# Altium PCB WavePCB.PcbDoc
Units mm, origin at the board's own origin, x right, y up, seen from the top; angles counter-clockwise.
Board outline 41.02 x 46.99 mm, 2 copper layers (Top Layer, Bottom Layer), stack 1.571 mm thick; 29 components, 30 nets, 137 pads, 29 vias.
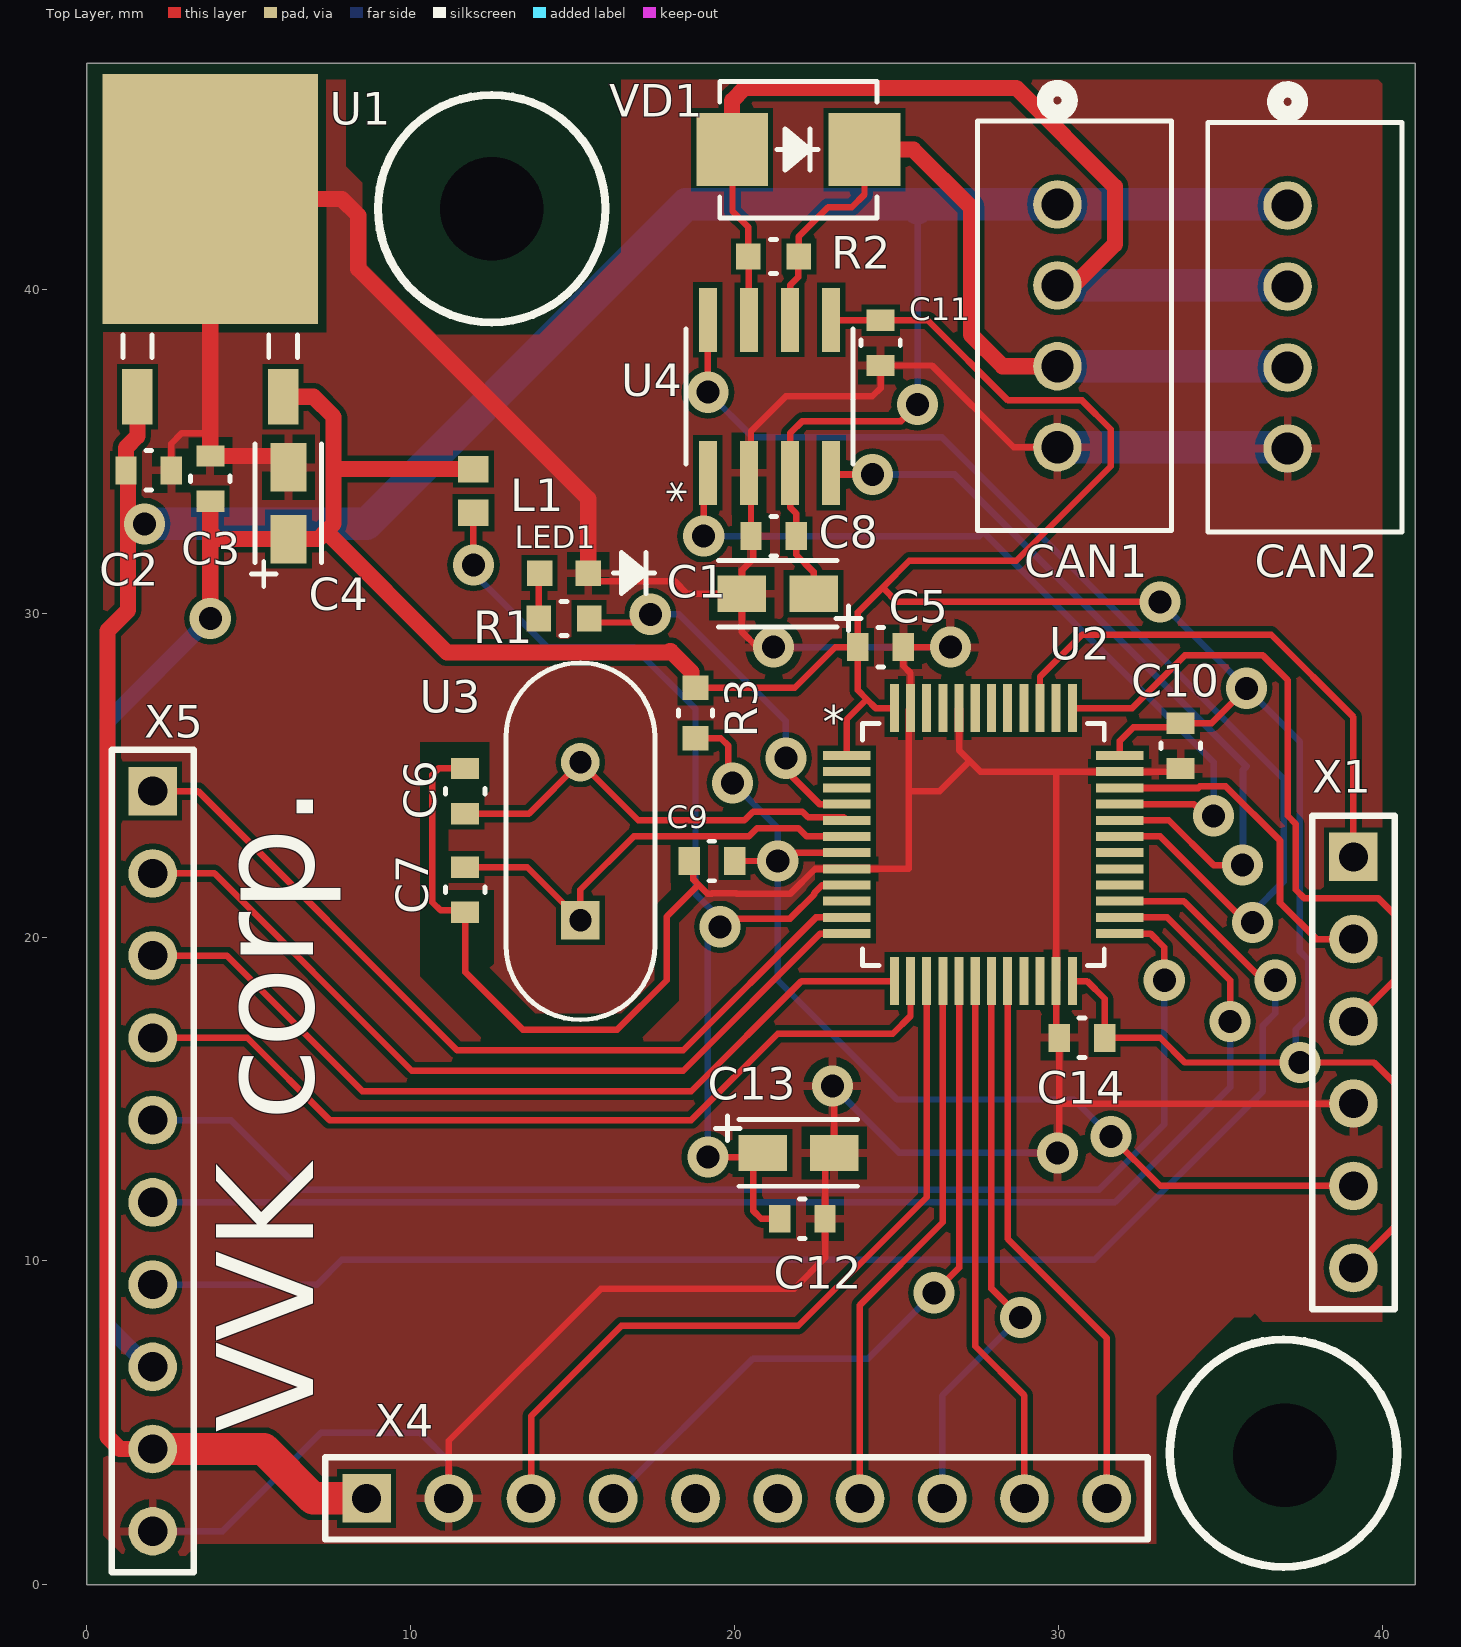
[diagram p0: Top Layer view]
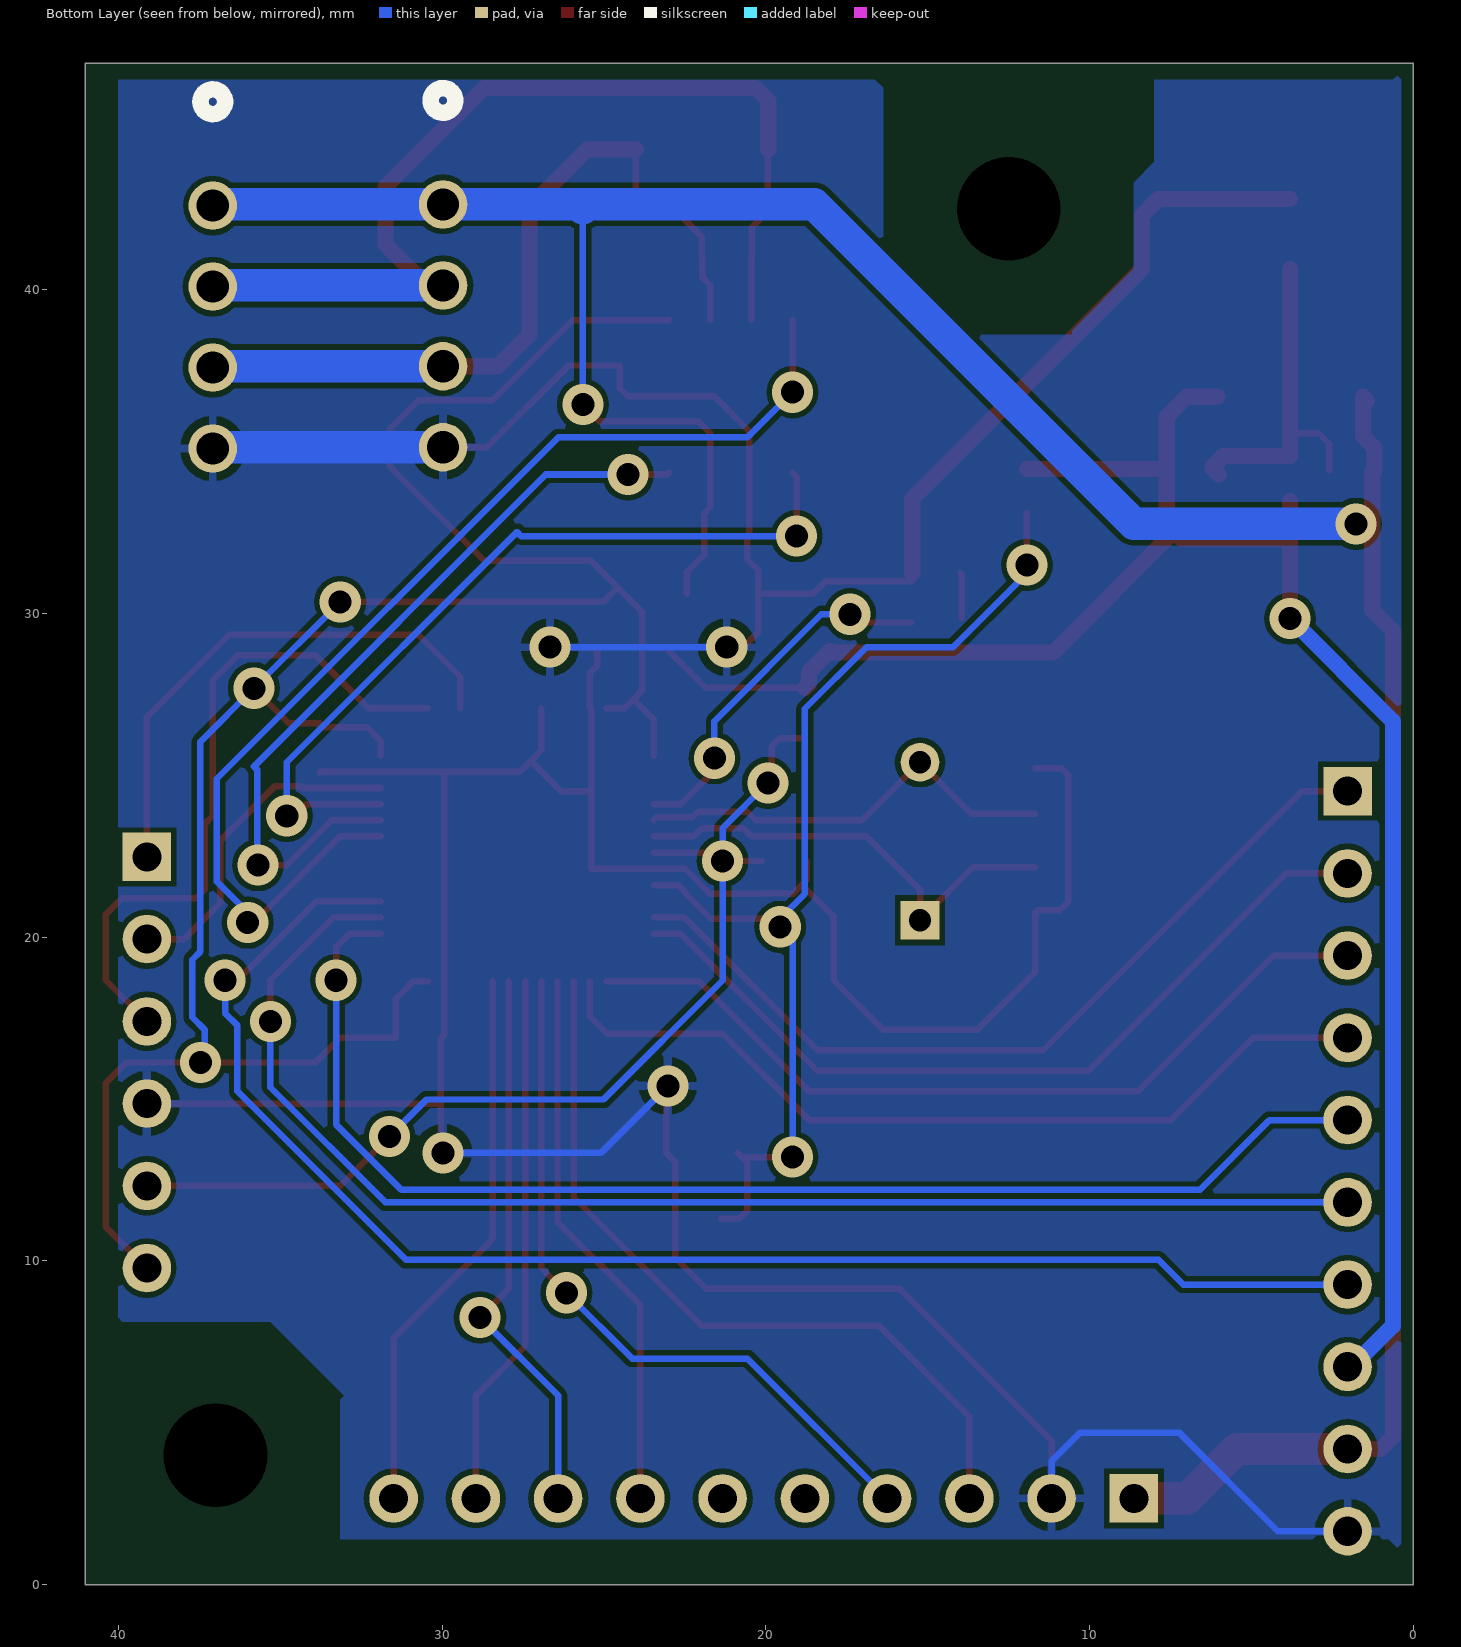
[diagram p1: Bottom Layer view, seen from below]
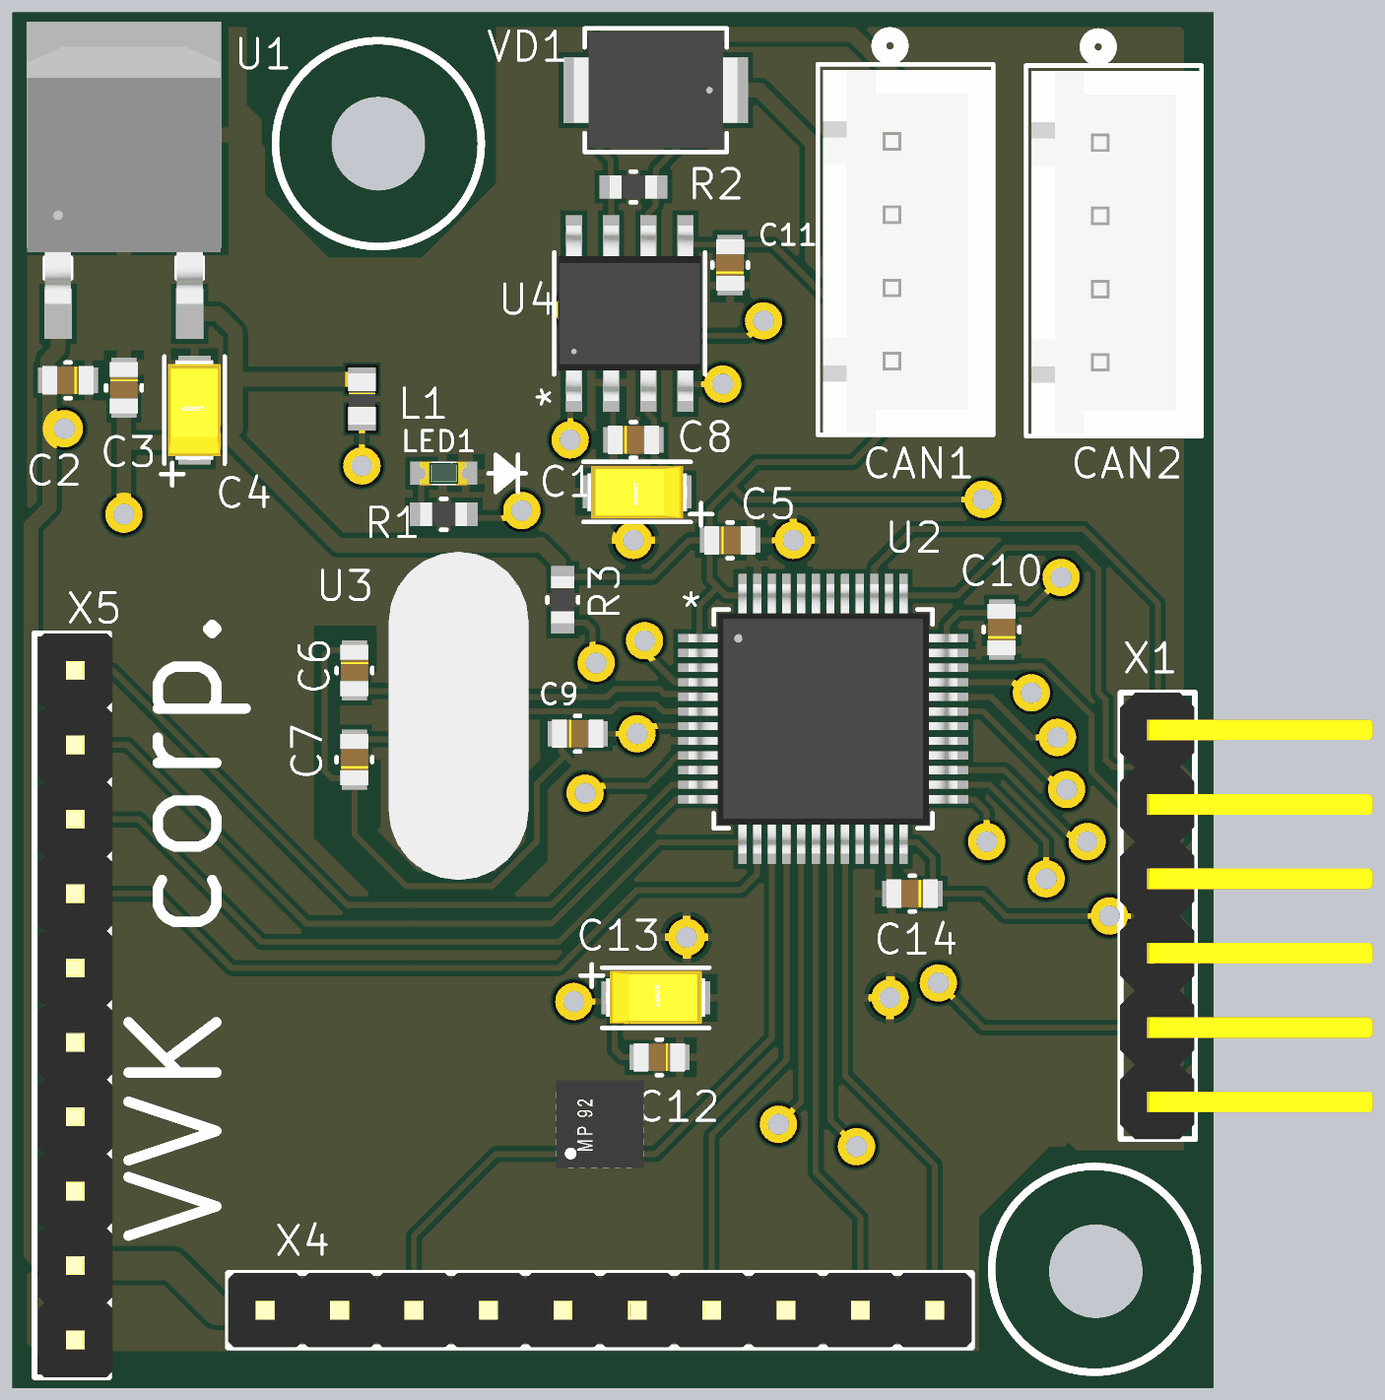
[diagram p2: 3D render of the assembled board from above, using the file's embedded part models]

## Layer stack, top to bottom
Top Solder: solder mask 0.0102, Solder Resist, Dk 3.5
Top Layer: signal copper 0.0356
Dielectric 1: core 1.5, FR-4, Dk 4.2
Bottom Layer: signal copper 0.0356
Bottom Solder: solder mask 0.0102, Solder Resist, Dk 3.5

## Board outline
0,0 0,46.99 41.021,46.99 41.021,0

## Design rules (kind name [scope] priority, off if disabled: settings)
Clearance [All] p1: gap=0.17 ignorepadtopadclearanceinfootprint=FALSE
HoleSize [All] p1: absolutevalues=TRUE maxlimit=5 minlimit=0.025 maxpercent=80.000 minpercent=20.000
MinimumSolderMaskSliver [All] p1: minsoldermaskwidth=0.17
PolygonConnect [All] p1: connectstyle=Relief reliefconductorwidth=0.254 reliefentries=4 polygonreliefangle="90 Angle" airgapwidth=0.254
RoutingVias [All] p1: holewidth=0.711 width=1.27 viastyle="Through Hole" minholewidth=0.711 minwidth=1.27 maxholewidth=0.711 maxwidth=1.27
SilkToSilkClearance [All] p1: silktosilkclearance=0.2
SilkToSolderMaskClearance [IsPad] p1: minsilkscreentomaskgap=0.17 clearancetoexposedcopper=TRUE
SolderMaskExpansion [All] p1: expansion=0.102
Width [All] p1: maxlimit=2 minlimit=0.2 preferedwidth=0.2
26 further rules are at their usual default settings.

## Components (designator, comment, footprint, x,y, rotation, side; value= is the part's Value field where it differs from the comment)
C1 "293D475X9020A2TE3" CAPT3216N_KEM 21.336,30.607 r180 top value=Value
C2 "0.1uF" 0603-L 1.905,34.417 r180 top value=Value
C3 "0.1uF" 0603-L 3.81,34.163 r270 top value=Value
C4 "T491A476M006AT" CAPT3216N_KEM 6.223,33.401 r90 top value=Value
C5 "0.1uF" 0603-L 24.511,28.956 r0 top value=Value
C6 "20pF" 0603-L 11.684,24.511 r270 top value=Value
C7 "20pF" 0603-L 11.684,21.463 r90 top value=Value
C8 "0.1uF" 0603-L 21.209,32.385 r0 top value=Value
C9 "0.1uF" 0603-L 19.304,22.352 r0 top value=Value
C10 "0.1uF" 0603-L 33.782,25.908 r90 top value=Value
C11 "0.1uF" 0603-L 24.511,38.354 r90 top value=Value
C12 "0.1uF" 0603-L 22.098,11.303 r180 top value=Value
C13 "293D475X9020A2TE3" CAPT3216N_KEM 21.971,13.335 r0 top value=Value
C14 "0.1uF" 0603-L 30.734,16.891 r180 top value=Value
CAN1 "B4B-XH-A (LF)(SN)" "CONN_B4B-XH-A (L" 29.972,42.632 r270 top value=Value (schematic designator X3)
CAN2 "B4B-XH-A (LF)(SN)" "CONN_B4B-XH-A (L" 37.084,42.592 r270 top value=Value (schematic designator X2)
L1 "742792651" IND_BLM18_0603 11.938,33.782 r90 top value=Value
LED1 "LTST-C191TGKT" LED_LTW-C193TS5_ 14.732,31.242 r180 top value=Value
R1 "470" RC0603N 14.732,29.845 r180 top value=Value
R2 "120" RC0603N 21.209,41.021 r0 top value=Value
R3 "10k" RC0603N 18.796,26.924 r90 top value=Value
U1 "LF33CDT-TRY" DPAK_STM 3.81,42.799 r0 top
U2 "STM32F303CBT6" LQFP-48_STM 27.686,22.86 r0 top
U3 "8.000MHZ HC49/4H/30/" HC49-4H 15.24,20.523 r90 top
U4 "MCP2562FD-E/SN" SOIC8-N_MC_MCH 21.082,36.703 r90 top
VD1 "SM6T18CA" SMB_STM 21.971,44.323 r180 top value=Value
X1 "PLS6R" PLS-6R 39.116,22.479 r0 top value=Value
X4 "GY9250" GY9250 8.636,2.667 r90 top
X5 "PLS10" PLS-8 2.032,24.511 r0 top value=Value

## Footprints (in the part's own frame and the unit in brackets; to place one, negate y for a bottom-side part, rotate by r counter-clockwise, add the part's x,y. Pads: shape width x height; smd on the part's side, far side on the other; paste and mask are expansions set on the pad)
0603-L [mil]
  rect 26x34 smd paste+0 mask+0: 1(-27.5,0) 2(27.5,0)
  silkscreen extent -3,-24 3,24, body extent -34,-19 34,19, height 35
CAPT3216N_KEM [mil]
  rect 58.96x44 smd paste+0 mask+0: 1(-43.52,0) 2(43.52,0)
  silkscreen extent -101,-41 72,45, body extent -67,-35 67,36, height 71
"CONN_B4B-XH-A (L" [mil]
  round 59 hole 39 mask+0: 1(0,0) 2(98.43,0) 3(196.86,0) 4(295.29,0)
  silkscreen extent -141,-97 397,139, body extent -94,-90 394,136, height 276
DPAK_STM [mil]
  rect 37x67 smd paste+0 mask+0: 1(-88.58,-240.5) 2(88.58,-240.5)
  rect 262x304 smd paste+0 mask+0: 3(0,0)
  silkscreen extent -106,-193 106,-165, body extent -130,-227 130,118, height 99
GY9250 [mm]
  rect 1.5x1.5 hole 0.9: 1(0,0)
  round 1.5 hole 0.9: 2(0,-2.54) 3(0,-5.08) 4(0,-7.62) 5(0,-10.16) 6(0,-12.7) 7(0,-15.24) 8(0,-17.78) 9(0,-20.32) 10(0,-22.86)
  silkscreen extent -1.27,-24.13 1.27,1.27, body extent -1.27,-24.76 13.97,1.91, height 9
HC49-4H [mil]
  rect 47x47 hole 27 mask+0: 1(0,0)
  round 47 hole 27 mask+0: 2(192,0)
  silkscreen extent -121,-90 313,91, body extent -125,-94 317,94, height 138
IND_BLM18_0603 [mil]
  rect 32x37 smd: 1(-26.5,0) 2(26.5,0)
  body extent -34,-19 34,19, height 37
LED_LTW-C193TS5_ [mil]
  rect 31x31 smd paste+0 mask+0: 1(-29.5,0) 2(29.5,0)
  silkscreen extent -110,-25 -60,25, body extent -31,-16 32,16, height 24
LQFP-48_STM [mil]
  rect 58x11 smd paste+0 mask+0: 1(-166,108.27) 2(-166,88.58) 3(-166,68.9) 4(-166,49.21) 5(-166,29.53) 6(-166,9.84) 7(-166,-9.84) 8(-166,-29.53) 9(-166,-49.21) 10(-166,-68.9) 11(-166,-88.58) 12(-166,-108.27) 25(166,-108.27) 26(166,-88.58) 27(166,-68.9) 28(166,-49.21) 29(166,-29.53) 30(166,-9.84) 31(166,9.84) 32(166,29.53) 33(166,49.21) 34(166,68.9) 35(166,88.58) 36(166,108.27)
  rect 11x58 smd paste+0 mask+0: 13(-108.27,-166) 14(-88.58,-166) 15(-68.9,-166) 16(-49.21,-166) 17(-29.53,-166) 18(-9.84,-166) 19(9.84,-166) 20(29.53,-166) 21(49.21,-166) 22(68.9,-166) 23(88.58,-166) 24(108.27,-166) 37(108.27,166) 38(88.58,166) 39(68.9,166) 40(49.21,166) 41(29.53,166) 42(9.84,166) 43(-9.84,166) 44(-29.53,166) 45(-49.21,166) 46(-68.9,166) 47(-88.58,166) 48(-108.27,166)
  silkscreen extent -147,-147 147,147, body extent -181,-181 181,181, height 63
PLS-6R [mm]
  rect 1.5x1.5 hole 0.9: 1(0,0)
  round 1.5 hole 0.9: 2(0,-2.54) 3(0,-5.08) 4(0,-7.62) 5(0,-10.16) 6(0,-12.7)
  silkscreen extent -1.27,-13.97 1.27,1.27, body extent -1.29,-13.97 7.33,1.27, height 6.55
PLS-8 [mm]
  rect 1.5x1.5 hole 0.9: 1(0,0)
  round 1.5 hole 0.9: 2(0,-2.54) 3(0,-5.08) 4(0,-7.62) 5(0,-10.16) 6(0,-12.7) 7(0,-15.24) 8(0,-17.78) 9(0,-20.32) 10(0,-22.86)
  silkscreen extent -1.27,-24.13 1.27,1.27, body extent -1.14,-24.13 1.4,1.27, height 8.54
RC0603N [mm]
  rect 0.756x0.8 smd paste+0 mask+0: 1(-0.778,0) 2(0.778,0)
  silkscreen extent -0.09,-0.53 0.09,0.53, body extent -0.8,-0.4 0.8,0.4, height 0.71
SMB_STM [mil]
  rect 87x89 smd paste+0 mask+0: 1(-80.5,0) 2(80.5,0)
  silkscreen extent -96,-83 96,83, body extent -110,-78 110,78, height 124
SOIC8-N_MC_MCH [mil]
  rect 78x22 smd paste+0 mask+0: 1(-93,75) 2(-93,25) 3(-93,-25) 4(-93,-75) 5(93,-75) 6(93,-25) 7(93,25) 8(93,75)
  silkscreen extent -82,-102 82,102, body extent -118,-96 118,97, height 69

## Part data
C1 C13: library part T491A476M006AT, "No Description Available", Built_By=EMA_UL_Team, Copyright="Copyright (C) 2018 Accelerated Designs. All rights reserved", Manufacturer_Part_Number=T491A476M006AT, RefDes=RefDes, SourceLibrary=Kemet_2012-01-01_Caps1_2, Type=DEV, Vendor=Kemet
C2 C3 C5 C6 C7 C8 C9 C10 C11 C12 C14: library part 0603ZC224JAT2A, "No Description Available", Built_By=EMA_UL_Team, Copyright="Copyright (C) 2018 Accelerated Designs. All rights reserved", Manufacturer_Part_Number=0603ZC224JAT2A, RefDes=RefDes, Type=DEV, Vendor="AVX Corporation"
C4 LED1 U1 U4 X1: "No Description Available", RefDes=RefDes, Type=DEV
  C4: Built_By=EMA_UL_Team, Copyright="Copyright (C) 2018 Accelerated Designs. All rights reserved", Manufacturer_Part_Number=T491A476M006AT, SourceLibrary=Kemet_2012-01-01_Caps1_2, Vendor=Kemet
  LED1: Built_By=EMA_Justin, Copyright="Copyright (C) 2016 Accelerated Designs. All rights reserved", Manufacturer_Part_Number=LTST-C191TGKT, SourceLibrary=Lite_On_2018-12-15, Vendor=Lite-On
  U1: Built_By=EMA_UL_Team, Copyright="Copyright (C) 2018 Accelerated Designs. All rights reserved", Manufacturer_Part_Number=LF33CDT-TRY, SourceLibrary=StMicro_2015-03-30, Vendor=STMicroelectronics
  U4: Built_By=EMA_Jessica, Copyright="Copyright (C) 2018 Accelerated Designs. All rights reserved", Manufacturer_Part_Number=MCP2562FD-E/SN, SourceLibrary=Microchip_2019-08-23_14, Vendor=Microchip
  X1: Built_By=EMA_UL_Team, Copyright="Copyright (C) 2018 Accelerated Designs. All rights reserved", Manufacturer_Part_Number=PLS6R, Vendor=JST
CAN1 CAN2: library part "B4B-XH-A (LF)(SN", "No Description Available", Built_By=EMA_Cory, Copyright="Copyright (C) 2018 Accelerated Designs. All rights reserved", Datasheet=http://www.jst-mfg.com/product/pdf/eng/eXH.pdf, Manufacturer_Part_Number="B4B-XH-A (LF)(SN)", RefDes=RefDes, Type=DEV, Vendor=JST
L1: library part BLM18BB331SN1D, "No Description Available", Built_By=EMA_UL_Team, Copyright="Copyright (C) 2018 Accelerated Designs. All rights reserved", Manufacturer_Part_Number=BLM18BB331SN1D, RefDes=RefDes, Type=DEV, Vendor=MURATA
R1 R2 R3: library part ERA-3AEB101V, "No Description Available", Built_By=EMA_UL_Team, Copyright="Copyright (C) 2018 Accelerated Designs. All rights reserved", Manufacturer_Part_Number=ERA-3AEB101V, RefDes=RefDes, Type=DEV, Vendor=Panasonic
U2: library part STM32F303CCT6, "No Description Available", Built_By=EMA_UL_Team, Copyright="Copyright (C) 2018 Accelerated Designs. All rights reserved", Link=https://www.promelec.ru/product/241316/, Manufacturer_Part_Number=STM32F303CBT6, RefDes=RefDes, SourceLibrary=StMicro_2015-03-30, Type=DEV, Vendor=STMicroelectronics
U3: library part "8.000MHZ HC49/4H", "No Description Available", Built_By=EMA_UL_Team, Copyright="Copyright (C) 2018 Accelerated Designs. All rights reserved", Link=------------, Manufacturer_Part_Number="8.000MHZ HC49/4H/30/", RefDes=RefDes, SourceLibrary=Euroquartz_2010-01-01, Type=DEV, Vendor=Euroquartz
VD1: "No Description Available", Manufacturer_Part_Number=LXES1UTAA1-157, Built_By=EMA_UL_Team, Copyright="Copyright (C) 2018 Accelerated Designs. All rights reserved", Link=https://www.digikey.com/product-detail/en/toshiba-semiconductor-and-storage/DF2S5-6CT-L3F/DF2S5-6CTL3FCT-ND/5810250, RefDes=RefDes, SourceLibrary=Murata, Type=Type, Vendor=Toshiba
X5: library part PLS6R, "No Description Available", Built_By=EMA_UL_Team, Copyright="Copyright (C) 2018 Accelerated Designs. All rights reserved", Manufacturer_Part_Number=PLS10, RefDes=RefDes, Type=DEV, Vendor=JST

## Free pads (board coordinates)
  round 0 hole 3.2 unplated: 3(12.5,42.5) 3(37,4)

## Via types
v1: diameter 1.27, hole 0.711, Top Layer to Bottom Layer, 29 vias

## Nets (pads, with @x,y where several pads share a name; then routed paths per layer and width w, separated by ;. In a path a pad name is that pad's centre, name@x,y a point inside that pad or via, vN(x,y) a via of type N, cw(c..) or ccw(c..) an arc to the next point about the centre after c; other vN are vias at no path point)
+3.3V: C3.2 C4.1 C5.1 C10.2 C11.2 C14.1 L1.2 R3.2 U1.2 U2.1 U2.24 U2.36 U2.48 U4.5 X1.6 X5.8 | length 136.4
  Top Layer w0.2: R3.2 21.86,27.702 23.114,28.956 C5.1 ; U4.5 23,39.052 C11.2 25.971,39.052 28.448,36.576 30.734,36.576 31.623,35.687 31.623,34.544 28.702,31.623 25.4,31.623 24.606,30.829 ; U2.1 23.47,26.733 24.086,27.349 ; U2.48 24.359,27.076 24.086,27.349 ; U2.24 30.886,18.644 31.432,18.098 C14.1 33.147,16.891 33.909,16.129 v1(37.465,16.129) 39.751,16.129 40.386,15.494 40.386,11.049 X1.6 ; U2.36 31.902,26.06 32.322,26.479 C10.2@33.782,26.479 ; v1(33.147,30.353) 25.019,30.353 24.606,30.766 24.606,30.829 ; C10.2 34.734,26.607 v1(35.814,27.686) ; C5.1 23.812,30.035 24.606,30.829 ; C5.1 23.812,27.622 24.086,27.349
  Top Layer w0.5: v1(3.81,29.845) 3.81,32.512 ; C3.2 3.81,32.512 ; U1.2 6.998,36.69 7.62,36.068 7.62,34.417 ; L1.2 7.658,34.455 7.62,34.417 ; R3.2 18.669,27.829 18.669,28.194 18.034,28.829 18.002,28.829 17.963,28.79 11.126,28.79 7.385,32.531 ; 3.81,32.512 4.026,32.296 C4.1 7.15,32.296 7.385,32.531 ; 7.385,32.531 7.62,32.766 7.62,34.417
  Bottom Layer w0.2: v1(33.147,30.353) v1(35.814,27.686) 37.465,26.035 37.465,19.558 37.719,19.304 37.719,17.526 37.338,17.145 37.338,16.129 v1(37.465,16.129)
  Bottom Layer w0.5: X5.8 1.905,6.731 0.635,8.001 0.635,26.67 v1(3.81,29.845)
+5V: C1.1 C2.2 C8.2 CAN1.1 CAN2.1 U1.1 U4.3 X4.1 X5.9 | length 96.7
  Top Layer w0.2: C1.1 22.441,31.28 21.907,31.813 C8.2 21.907,33.084 21.717,33.274 U4.3 21.717,35.56 22.098,35.941 25.146,35.941 v1(25.654,36.449)
  Top Layer w0.5: U1.1@1.435,36.565 U1.1 1.56,35.469 1.206,35.115 C2.2 1.27,34.353 1.27,30.099 0.635,29.464 0.635,4.572 1.016,4.191 X5.9
  Top Layer w1: X5.9 5.461,4.191 6.985,2.667 X4.1
  Bottom Layer w0.2: v1(25.654,36.449) 25.654,42.505
  Bottom Layer w1: v1(1.778,32.766) 8.636,32.766 18.502,42.632 25.527,42.632 ; 25.654,42.505 25.527,42.632 ; CAN2.1 37.044,42.632 CAN1.1 25.527,42.632
CAN_Rx: U2.32 U4.4 | length 24
  Top Layer w0.203: U4.4 23.038,34.29 v1(24.257,34.29) ; U2.32 33.413,23.61 34.798,22.225 v1(35.687,22.225)
  Bottom Layer w0.203: v1(24.257,34.29) 26.797,34.29 35.814,25.273 35.705,25.164 35.705,22.243 v1(35.687,22.225)
CAN_Tx: U2.33 U4.1 | length 25.5
  Top Layer w0.203: v1(19.05,32.385) 19.05,34.214 U4.1 ; U2.33 34.183,24.11 34.544,23.749 v1(34.798,23.749)
  Bottom Layer w0.203: v1(19.05,32.385) 27.559,32.385 27.686,32.512 34.798,25.4 v1(34.798,23.749)
CANH: CAN1.2 CAN2.2 R2.1 U4.7 VD1.2 | length 31.4
  Top Layer w0.2: VD1.2 19.939,44.31 19.939,42.418 20.431,41.926 R2.1 20.447,41.005 U4.7
  Top Layer w0.5: VD1.2 19.926,45.834 20.32,46.228 28.702,46.228 31.75,43.18 31.75,41.402 30.48,40.132 CAN1.2
  Bottom Layer w1: CAN1.2 37.044,40.132 CAN2.2
CANL: CAN1.3 CAN2.3 R2.2 U4.6 VD1.1 | length 24.8
  Top Layer w0.2: U4.6 21.717,40.132 21.971,40.386 21.971,41.005 R2.2 21.987,41.64 22.892,42.545 23.622,42.545 24.016,42.939 VD1.1
  Top Layer w0.5: VD1.1 25.527,44.323 27.305,42.545 27.305,38.608 28.281,37.632 CAN1.3
  Bottom Layer w1: CAN1.3 37.044,37.632 CAN2.3
CS: U2.18 X4.9 | length 16.6
  Top Layer w0.2: U2.18 27.436,7.362 28.956,5.842 X4.9
FSYNC: U2.20 X4.10 | length 17.2
  Top Layer w0.2: U2.20 28.436,10.68 31.496,7.62 X4.10
GND: C1.2 C2.1 C3.1 C4.2 C5.2 C6.1 C7.1 C8.1 C9.1 C10.1 C11.1 C12.1 C13.2 C14.2 CAN1.4 CAN2.4 LED1.1 U1.3 U2.8 U2.23 U2.35 U2.44 U2.47 U4.2 X1.4 X4.2 X5.10 | length 174.6
  Top Layer w0.2: C2.1 2.603,35.242 2.921,35.56 3.81,35.56 ; X4.2 11.176,4.445 15.875,9.144 21.844,9.144 22.796,10.096 C12.1 22.796,13.055 C13.2 23.076,15.405 v1(23.025,15.405) ; C6.1 10.858,25.209 10.668,25.019 10.668,21.082 10.922,20.828 11.62,20.828 C7.1 11.684,18.923 13.462,17.145 16.383,17.145 17.907,18.669 17.907,20.637 18.891,21.622 ; LED1.1@15.481,30.988 18.161,30.988 18.542,30.607 C1.2 ; C9.1@18.732,22.352 18.732,21.78 18.891,21.622 ; v1(21.209,28.956) 20.701,28.956 20.231,29.426 C1.2 ; v1(26.67,28.956) C5.2 25.209,28.384 25.436,28.158 U2.47 25.388,27.028 25.388,24.511 ; U2.44 26.936,25.769 27.266,25.439 ; v1(29.972,13.335) 30.035,13.399 30.035,14.859 ; CAN1.4 28.622,35.132 26.098,37.655 C11.1 24.511,36.957 24.257,36.703 21.59,36.703 20.511,35.623 C8.1 20.574,32.322 20.574,31.675 20.231,31.331 C1.2 ; C10.1@33.782,25.082 33.754,25.11 U2.35 29.972,25.11 ; X1.4 30.035,14.859 ; 18.891,21.622 19.177,21.336 19.294,21.336 19.31,21.352 20.06,21.352 20.076,21.336 21.717,21.336 22.491,22.11 U2.8 25.388,22.11 25.388,24.511 ; 25.388,24.511 26.337,24.511 27.266,25.439 ; 27.266,25.439 27.595,25.11 29.972,25.11 ; 29.972,25.11 29.936,25.074 U2.23 29.936,16.99 C14.2 30.035,14.859
  Top Layer w0.5: U1.3@3.81,40.64 3.81,35.56 C3.1 5.868,34.861 C4.2 C4.2@6.007,34.29 ; U1.3 7.874,42.799 8.382,42.291 8.382,40.64 15.481,33.541 LED1.1
  Bottom Layer w0.2: X5.10 4.191,1.651 7.239,4.699 10.287,4.699 11.176,3.81 X4.2 ; v1(21.209,28.956) v1(26.67,28.956) ; v1@23.368,15.748 v1(23.025,15.405) 25.094,13.335 v1(29.972,13.335)
  Bottom Layer w1: CAN1.4 37.044,35.132 CAN2.4
INT: U2.19 X4.8 | length 17.3
  Top Layer w0.2: U2.19 27.936,9.148 v1(28.829,8.255)
  Bottom Layer w0.2: X4.8 26.416,5.842 v1(28.829,8.255)
NetC6_2: C6.2 U2.5 U3.2 | length 13.4
  Top Layer w0.2: C6.2 13.652,23.812 U3.2 17.03,23.61 20.308,23.61 20.574,23.876 22.098,23.876 22.274,23.7 23.379,23.7 U2.5
NetC7_2: C7.2 U2.6 U3.1 | length 14.3
  Top Layer w0.2: C7.2 13.602,22.162 U3.1 15.24,21.463 16.887,23.11 20.443,23.11 20.701,23.368 21.971,23.368 22.229,23.11 U2.6
NetC12_2: C12.2 C13.1 L1.1 U2.9 | length 33.6
  Top Layer w0.2: v1(11.938,31.496) L1.1 ; v1(19.177,13.208) C13.1@20.739,13.208 ; v1(19.558,20.32) 19.812,20.574 21.717,20.574 22.463,21.32 22.463,21.362 22.711,21.61 U2.9 ; C13.1 C13.1@20.739,13.208 ; C12.2 20.828,11.303 20.574,11.557 20.574,13.043 C13.1@20.739,13.208
  Bottom Layer w0.2: v1(11.938,31.496) 11.938,31.242 14.224,28.956 16.891,28.956 18.796,27.051 18.796,21.336 19.558,20.574 v1(19.558,20.32) 19.177,19.939 v1(19.177,13.208)
NetLED1_2: LED1.2 R1.2 | length 1.4
  Top Layer w0.2: R1.2 13.954,31.214 LED1.2
NetR1_1: R1.1 U2.4 | length 11.5
  Top Layer w0.2: R1.1@15.51,29.718 17.399,29.718 v1(17.399,29.972) ; v1(21.59,25.527) 21.59,25.146 22.626,24.11 U2.4
  Bottom Layer w0.2: v1(17.399,29.972) 18.288,29.972 21.59,26.67 v1(21.59,25.527)
NRST: C9.2 R3.1 U2.7 X1.5 | length 32.9
  Top Layer w0.2: R3.1 19.574,26.146 19.812,25.908 19.812,24.892 v1(19.939,24.765) ; C9.2@20.13,22.352 v1(21.336,22.352) ; v1@21.273,22.415 21.467,22.61 U2.7 ; v1(31.623,13.843) 33.147,12.319 X1.5
  Bottom Layer w0.2: v1(19.939,24.765) 21.336,23.368 v1(21.336,22.352) 21.336,18.669 25.019,14.986 30.48,14.986 v1(31.623,13.843)
PA1: U2.11 X5.1 | length 26.4
  Top Layer w0.2: X5.1 3.429,24.511 11.43,16.51 18.415,16.51 22.515,20.61 U2.11
PA2: U2.12 X5.2 | length 25.7
  Top Layer w0.2: X5.2 3.937,21.971 10.033,15.875 18.415,15.875 22.65,20.11 U2.12
PA3: U2.13 X5.3 | length 26
  Top Layer w0.2: X5.3 4.318,19.431 8.509,15.24 18.669,15.24 22.073,18.644 U2.13
PA4: U2.14 X5.4 | length 26.9
  Top Layer w0.2: X5.4 4.953,16.891 7.493,14.351 18.669,14.351 21.336,17.018 24.892,17.018 25.436,17.562 U2.14
PB12: U2.25 X5.5 | length 40
  Top Layer w0.2: U2.25 32.849,20.11 33.274,19.685 v1(33.274,18.669)
  Bottom Layer w0.2: X5.5 4.445,14.351 6.604,12.192 31.252,12.192 33.274,14.214 v1(33.274,18.669)
PB13: U2.26 X5.6 | length 42.3
  Top Layer w0.2: U2.26 33.365,20.61 35.306,18.669 v1(35.306,17.399)
  Bottom Layer w0.2: X5.6 31.75,11.811 35.306,15.367 v1(35.306,17.399)
PB14: U2.27 X5.7 | length 46.2
  Top Layer w0.2: U2.27 33.881,21.11 36.322,18.669 v1(36.703,18.669)
  Bottom Layer w0.2: X5.7 7.112,9.271 7.874,10.033 31.115,10.033 36.322,15.24 36.322,17.272 36.703,17.653 v1(36.703,18.669)
SPI1_MISO: U2.16 X4.7 | length 17
  Top Layer w0.2: X4.7 23.876,8.636 26.436,11.196 U2.16
SPI1_MOSI: U2.17 X4.4 | length 22.5
  Top Layer w0.2: v1(26.162,9.017) 26.936,9.791 U2.17
  Bottom Layer w0.2: X4.4 20.574,6.985 24.13,6.985 v1(26.162,9.017)
SPI1_SCK: U2.15 X4.3 | length 24.2
  Top Layer w0.2: X4.3 13.716,5.207 16.51,8.001 21.971,8.001 25.936,11.966 U2.15
STBY: U2.31 U4.8 | length 35
  Top Layer w0.2: v1(19.177,36.83) U4.8 ; U2.31 33.151,23.11 35.814,20.447 v1(36.005,20.447)
  Bottom Layer w0.2: v1(19.177,36.83) 20.574,35.433 26.416,35.433 36.957,24.892 36.957,21.717 36.005,20.764 v1(36.005,20.447)
SWCLK: U2.37 X1.3 | length 21.4
  Top Layer w0.2: U2.37 32.283,27.076 33.909,28.702 36.322,28.702 37.084,27.94 37.084,23.749 37.338,23.495 37.338,21.463 37.592,21.209 39.878,21.209 40.386,20.701 40.386,18.669 X1.3
SWDIO: U2.34 X1.2 | length 10.3
  Top Layer w0.203: U2.34 31.902,24.608 34.326,24.608 34.374,24.656 35.174,24.656 36.848,22.982 36.848,21.064 37.973,19.939 X1.2
SWO: U2.39 X1.1 | length 16.6
  Top Layer w0.2: U2.39 29.436,28.039 30.734,29.337 36.576,29.337 39.116,26.797 X1.1
pads on no net: U2.2 U2.3 U2.10 U2.21 U2.22 U2.28 U2.29 U2.30 U2.38 U2.40 U2.41 U2.42 U2.43 U2.45 U2.46 X4.5 X4.6

## Polygon pours and split planes (outlines as drawn)
GND on Top Layer "Top Layer-No Net" (solid, pour order 2): 0.508,46.609 0.635,46.482 8.001,46.482 8.001,43.815 8.509,43.307 8.509,40.894 10.795,38.608 13.97,38.608 16.51,41.148 16.51,46.482 39.878,46.482 40.005,46.355 40.005,8.128 36.322,8.128 36.068,8.382 35.941,8.255 35.433,8.255 33.02,5.842 33.02,1.27 3.429,1.27 3.048,0.889 1.143,0.889 0.508,1.524
GND on Bottom Layer "Top Layer-No Net" (solid, pour order 8): 0.508,1.143 0.762,1.397 33.147,1.397 33.147,5.715 33.02,5.842 35.306,8.128 39.878,8.128 40.005,8.255 40.005,46.482 16.637,46.482 16.383,46.228 16.383,40.513 14.478,38.608 10.541,38.608 10.541,38.735 8.636,40.64 8.636,43.307 8.001,43.942 8.001,46.482 0.635,46.482 0.508,46.609 0.381,46.482 0.381,1.27

## Other copper
Top Layer:
  pour cut-out: 11.303,24.384 12.319,24.384 12.446,24.511 12.446,26.035 10.287,26.035 10.287,18.796 12.192,16.891 17.145,16.891 18.288,18.034 18.288,20.447 19.19,21.349 19.19,22.835 18.914,23.11 18.034,23.11 18.034,21.463 17.526,20.955 17.526,18.669 16.51,17.653 13.843,17.653 12.446,19.05 12.573,19.177 12.573,21.463 11.176,21.463 11.176,24.257

## Silkscreen, mask and mechanical layers (free items; w line width, h text height)
Top Overlay:
  circle w0.254: c36.957,4.064 r3.513
  circle w0.254: c12.5,42.5 r3.513
  text "VVK corp." at 6.985,4.699 h3 r90
Mechanical 3:
  lines w0.254: 0,0 41.021,0 41.021,46.99 18.413,46.99 0,46.99 0,0

## Dimensions
-3.81,46.99 to -4.826,0 on Mechanical 10
0,-5.334 to 41.148,-4.826 on Mechanical 10

## Text inside footprints (layer, text, board x,y; h text height)
U1: Mechanical 13 "*" at 1.242,38.913 h1
U2: Top Overlay "*" at 22.733,26.162 h1; Mechanical 13 "*" at 24.143,25.225 h1
U4: Top Overlay "*" at 18.923,33.401 h1 r90; Mechanical 13 "*" at 19.977,34.811 h1 r90